# Altium PCB ArduinoUnoShield.PcbDoc
Units mm, origin at the board's own origin, x right, y up, seen from the top; angles counter-clockwise.
Board outline 53.34 x 59.34 mm, 2 copper layers (Top Layer, Bottom Layer), stack 1.521 mm thick; 32 components, 24 nets, 123 pads, 7 vias.
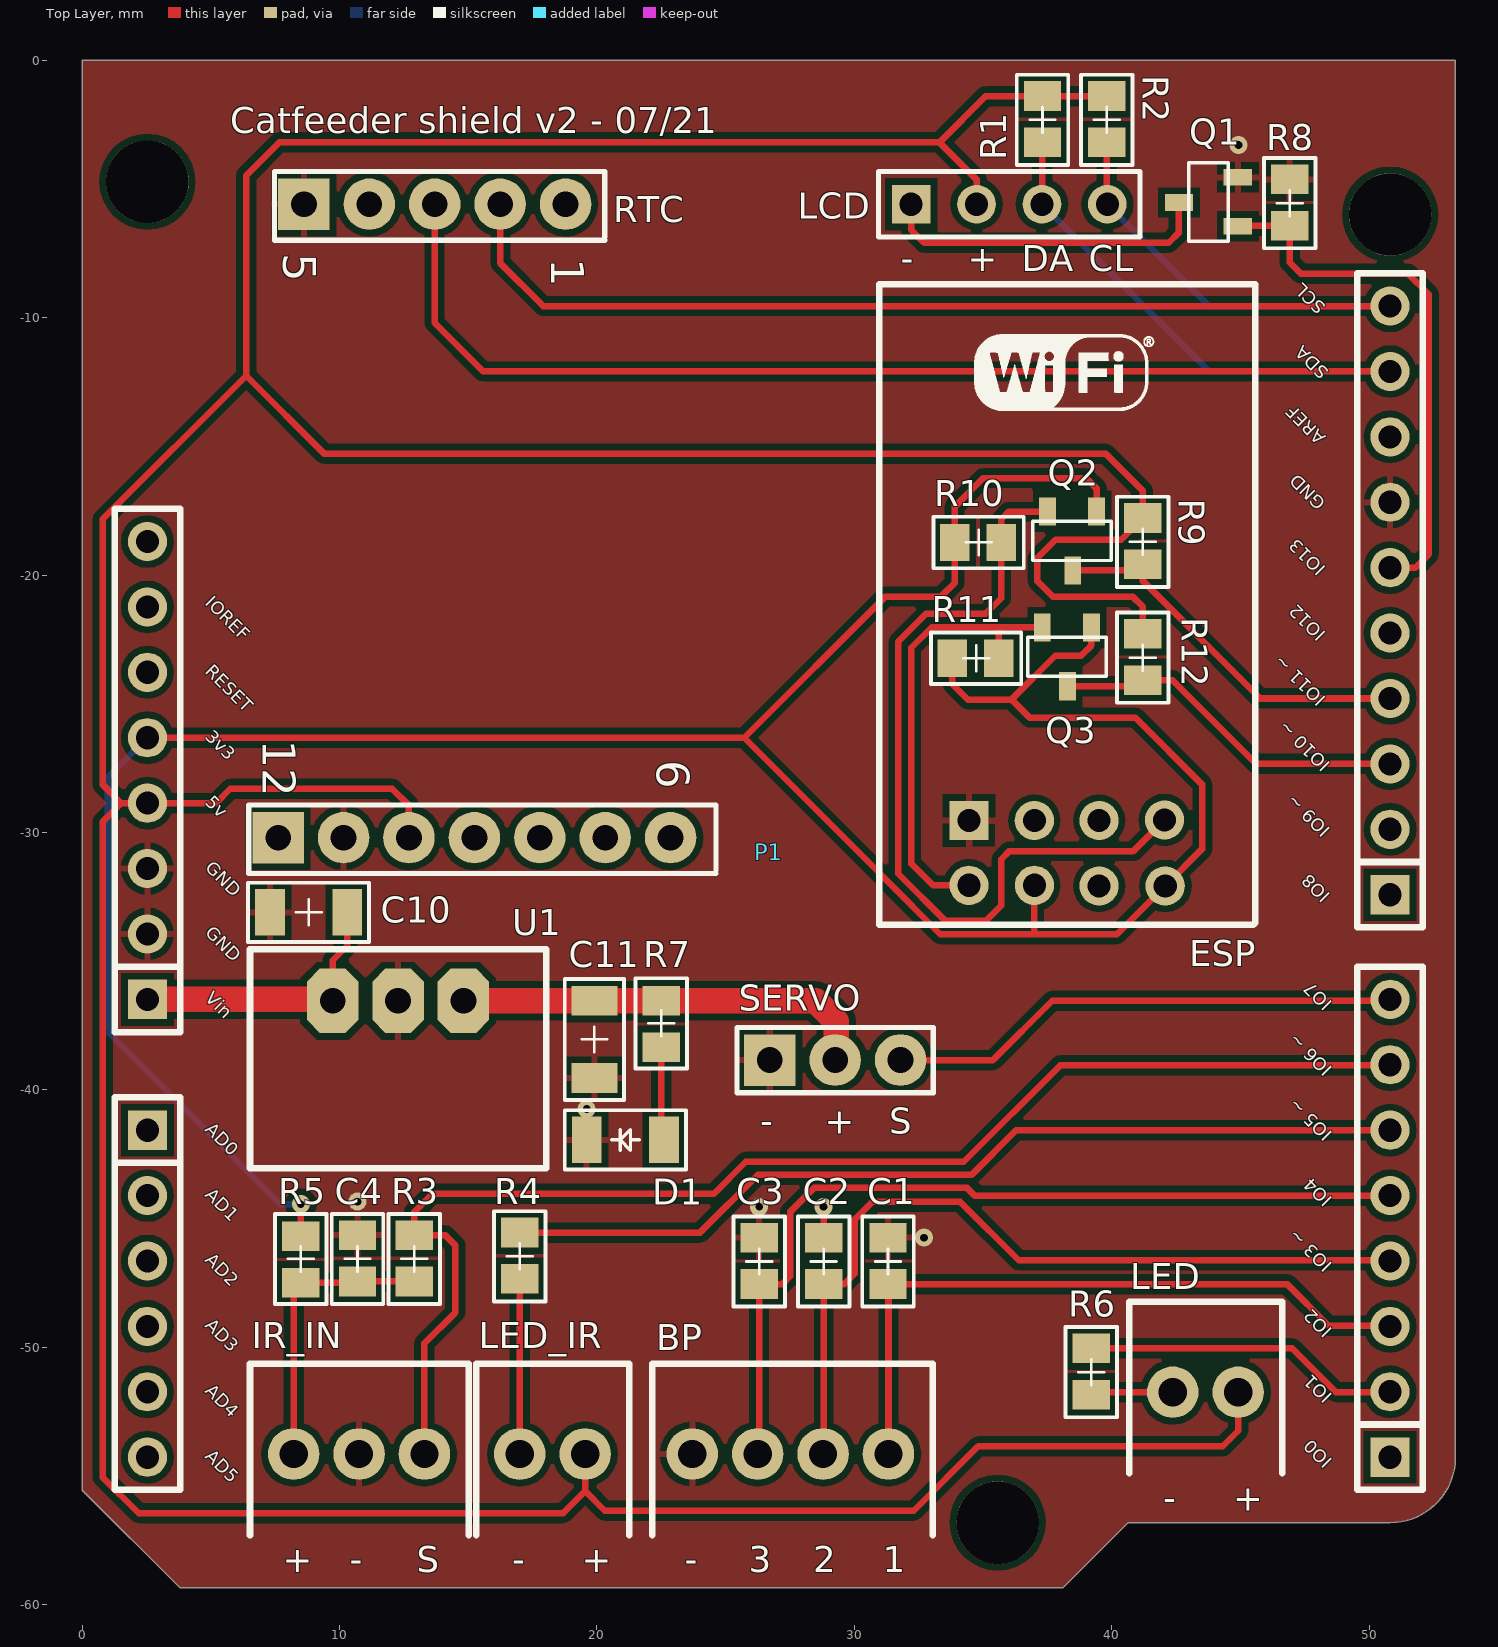
[diagram p0: Top Layer view]
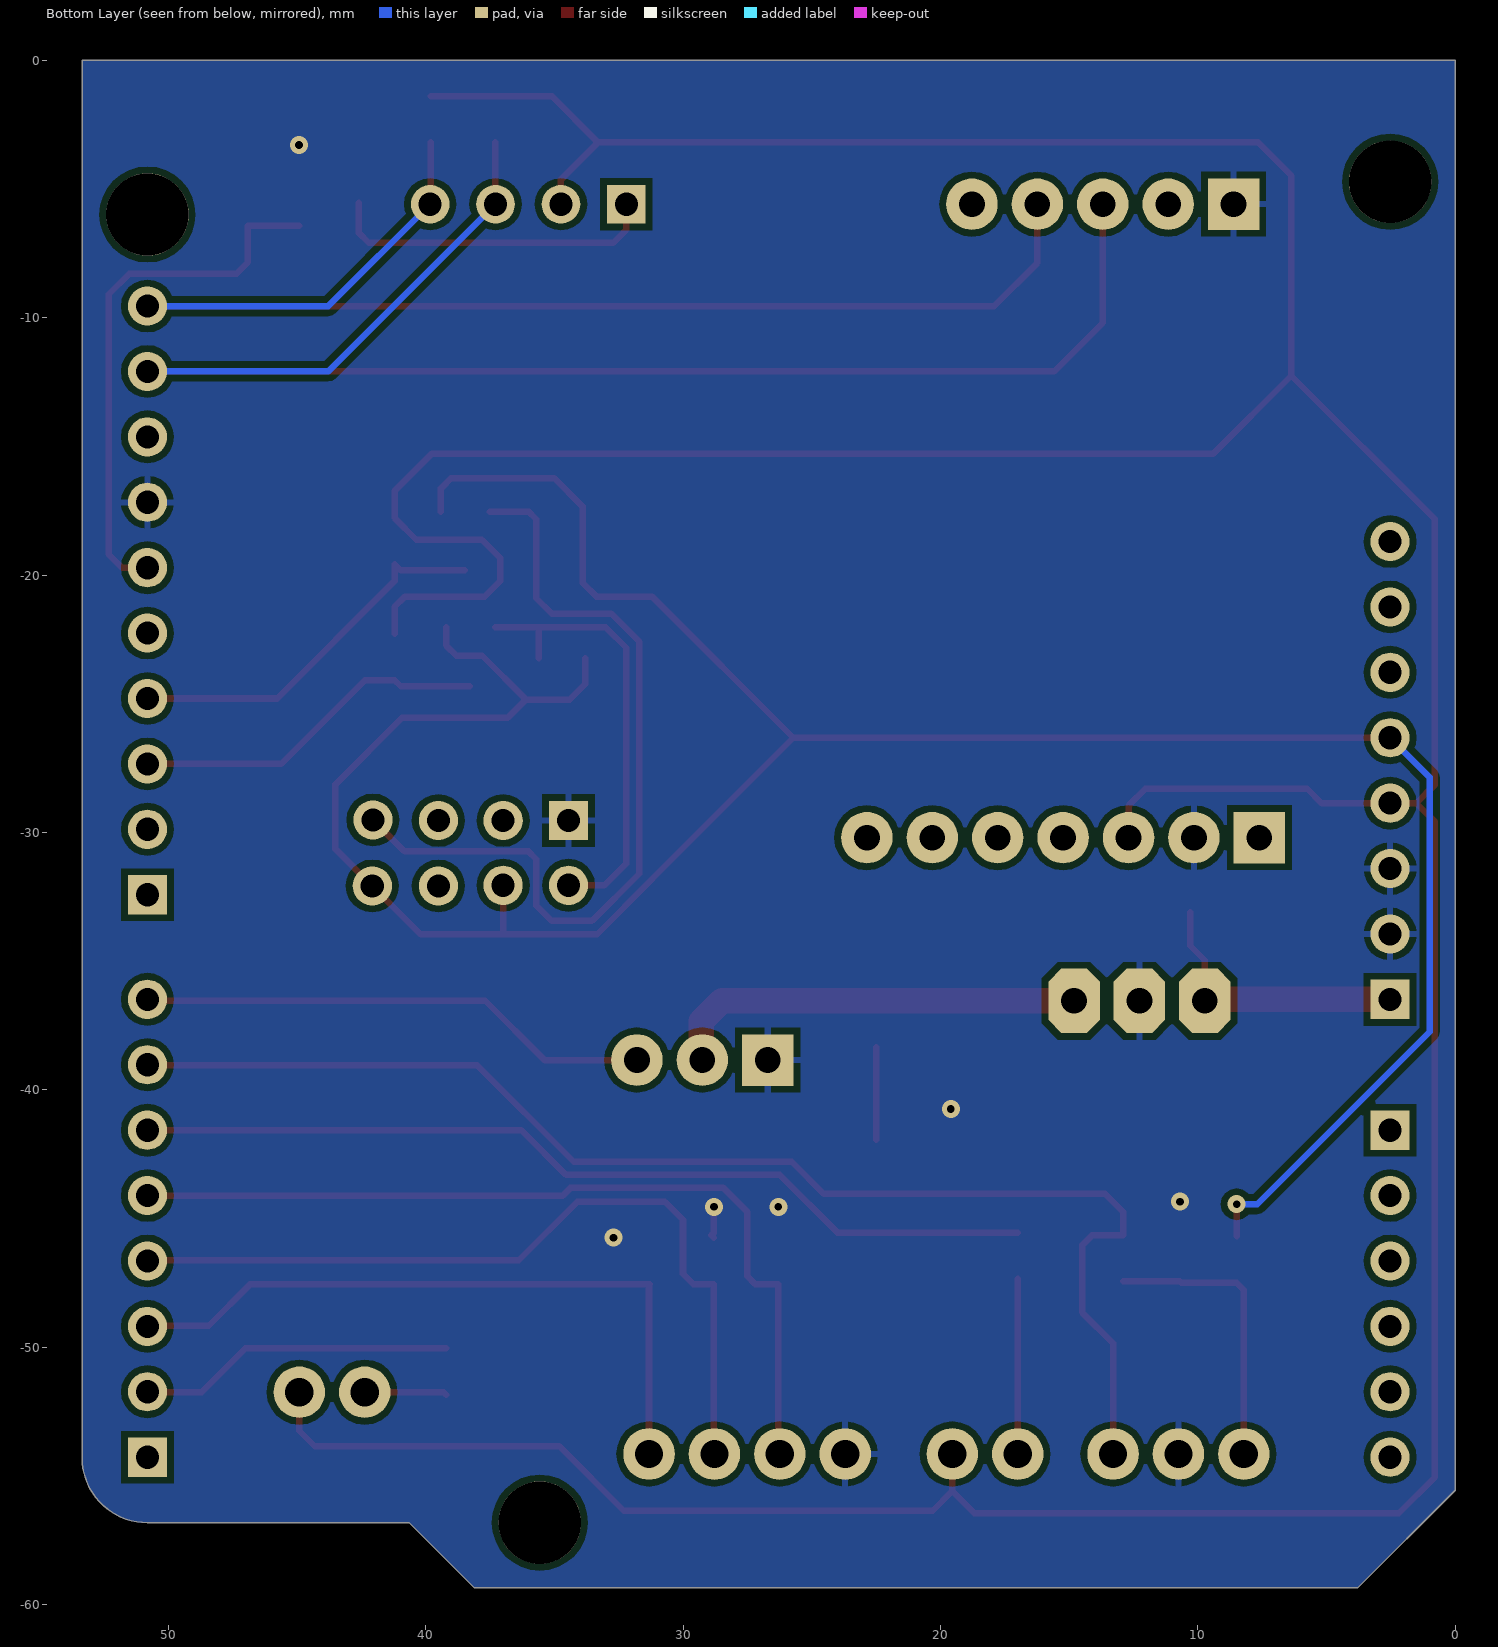
[diagram p1: Bottom Layer view, seen from below]

## Layer stack, top to bottom
Top Solder: solder mask 0.0102, Solder Resist, Dk 3.5
Top Layer: signal copper 0.0356
Dielectric1: dielectric 1.45, FR-4, Dk 4.8
Bottom Layer: signal copper 0.0356
Bottom Solder: solder mask 0.0102, Solder Resist, Dk 3.5

## Board outline
0.011,-55.541 3.81,-59.34 38.1,-59.34 40.64,-56.8 50.8,-56.8 ccw(c50.8,-54.26) 53.34,-54.26 53.34,0 0,0

## Design rules (kind name [scope] priority, off if disabled: settings)
Clearance [All] p1: gap=0.254 ignorepadtopadclearanceinfootprint=FALSE
HoleSize [All] p1: absolutevalues=TRUE maxlimit=5 minlimit=0.025 maxpercent=80.000 minpercent=20.000
PolygonConnect [All] p1: thpad.connectstyle=Relief thpad.reliefconductorwidth=0.254 thpad.reliefentries=4 thpad.polygonreliefangle="90 Angle" thpad.airgapwidth=0.254 smdpad.connectstyle=Relief smdpad.reliefconductorwidth=0.254 smdpad.reliefentries=4 smdpad.polygonreliefangle="90 Angle" smdpad.airgapwidth=0.254 via.connectstyle=Direct via.reliefconductorwidth=0.254 via.reliefentries=4 via.polygonreliefangle="90 Angle" via.airgapwidth=0.254
RoutingTopology [All] p1: topology=Vertical
RoutingVias [All] p1: holewidth=0.4 width=0.8 viastyle="Through Hole" minholewidth=0.4 minwidth=0.8 maxholewidth=0.4 maxwidth=0.8
SilkToSilkClearance [All] p1: silktosilkclearance=0.169
SilkToSolderMaskClearance SilkscreenOverComponentPads [IsPad] p1: minsilkscreentomaskgap=0.169 clearancetoexposedcopper=TRUE
SolderMaskExpansion [All] p1: expansion=0.102
Width [All] p1: maxlimit=1 minlimit=0.254 preferedwidth=0.254
26 further rules are at their usual default settings.

## Classes and differential pairs
component class IR: C4 IR_IN LED_IR R3 R4 R5
component class RTC: RTC
component class ArduinoUnoShield: P1 R1 R2
component class Wireless: ESP Q2 Q3 R9 R10 R11 R12
component class Display: BP C1 C2 C3 LCD LED Q1 R6 R8
component class Motor: C10 C11 D1 R7 SERVO U1

## Components (designator, comment, footprint, x,y, rotation, side; value= is the part's Value field where it differs from the comment)
BP "Bornier_4_vis" 282834-4 31.32,-54.136 r270 top
C1 "100nF" 0805-C 31.3,-45.736 r270 top
C2 "100nF" 0805-C 28.8,-45.736 r270 top
C3 "100nF" 0805-C 26.3,-45.736 r270 top
C4 "220n" 0805-C 10.7,-45.636 r270 top
C10 "10uF" 1206-C 7.3,-33.1 r0 top
C11 "10uF" 1206-C 19.9,-39.536 r90 top
D1 "Rouge 1206" 1206-Led-R 19.6,-41.936 r0 top
ESP "ESP8266 ESP-01" "ESP8266 ESP-01" 30.966,-33.6 r0 top locked
IR_IN "Bornier_3_vis" 282834-3 13.3,-54.136 r270 top
LCD "Header 4" HDR1X4 32.2,-5.6 r0 top
LED "Bornier_2_vis" 282834-2 44.9,-51.736 r270 top
LED_IR "Bornier_2_vis" 282834-2 19.54,-54.136 r270 top
P1 "UNO4NUCLEO" UNO4NUCLEO 50.8,-6 r270 top locked
Q1 "BSS123" SOT23-3 44.886,-6.461 r90 top
Q2 "BSS123" SOT23-3 39.4,-17.536 r180 top
Q3 "BSS123" SOT23-3 39.2,-22.038 r180 top
R1 "10k" 0805-R 37.3,-1.4 r270 top
R2 "10k" 0805-R 39.8,-1.4 r270 top
R3 "1k" 0805-R 12.9,-45.636 r270 top
R4 "330r" 0805-R 17,-45.536 r270 top
R5 "100r" 0805-R 8.5,-47.486 r90 top
R6 "330r" 0805-R 39.2,-50.036 r270 top
R7 "330r" 0805-R 22.5,-38.336 r90 top
R8 "10k" 0805-R 46.9,-4.636 r270 top
R9 "10k" 0805-R 41.2,-17.784 r270 top
R10 "10k" 0805-R 33.9,-18.736 r0 top
R11 "10k" 0805-R 33.8,-23.236 r0 top
R12 "10k" 0805-R 41.2,-22.286 r270 top
RTC "TinyRTC" "Tiny RTC" 7.618,-30.2 r270 top
SERVO "Header 3" HDR1X3 26.709,-38.837 r0 top
U1 "R-78B5.0-2.0" R78HB50V 9.734,-36.536 r180 top

## Footprints (in the part's own frame and the unit in brackets; to place one, negate y for a bottom-side part, rotate by r counter-clockwise, add the part's x,y. Pads: shape width x height; smd on the part's side, far side on the other; paste and mask are expansions set on the pad)
0805-C [mm] "Empreinte CMS CDR31 dim = 2.0 x 1.2"
  rect 1.15x1.45 smd: 1(0,0) 2(1.8,0)
  silkscreen extent -0.82,-1 2.68,1, body extent -0.34,-0.62 2.17,0.62, height 0.79
0805-R [mm] "Empreinte CMS CDR31 dim = 2.0 x 1.2"
  rect 1.15x1.45 smd: 1(0,0) 2(1.8,0)
  silkscreen extent -0.83,-1 2.67,1, body extent -0.09,-0.62 1.91,0.63, height 0.45
1206-C [mm] "Empreinte CMS CDR32  dim = 3.2 x 1.6"
  rect 1.15x1.8 smd: 1(0,0) 2(3,0)
  silkscreen extent -0.85,-1.15 3.85,1.15, body extent -0.13,-0.75 3.07,0.85, height 1
1206-Led-R [mm] "Diode CMS CDR33 3.2 x 1.6"
  rect 1.15x1.8 smd: 1(0,0) 2(3,0)
  silkscreen extent -0.85,-1.15 3.85,1.15, body extent -0.08,-0.8 3.12,0.8, height 0.6
282834-2 [mm] "Bornier 2vis"
  round 2 hole 1.1: 1(0,0) 2(0,-2.54)
  silkscreen extent -3.51,-4.24 3.16,1.71, body extent -3.28,-4.05 3.22,1.49, height 10
282834-3 [mm] "Bornier 3vis"
  round 2 hole 1.1: 1(0,0) 2(0,-2.54) 3(0,-5.08)
  silkscreen extent -3.51,-6.78 3.16,1.71, body extent -3.28,-6.55 3.22,1.53, height 10
282834-4 [mm] "Bornier 4vis"
  round 2 hole 1.1: 1(0,0) 2(0,-2.54) 3(0,-5.08) 4(0,-7.62)
  silkscreen extent -3.51,-9.18 3.16,1.71, body extent -3.34,-9.11 3.16,1.51, height 10
"ESP8266 ESP-01" [mil] "ESP8266 ESP-01"
  rect 60x60 hole 35.43: 1(137,160)
  round 60 hole 35.43: 2(137,61) 3(237,160) 4(237.01,60.98) 5(336,160) 6(336,60) 7(436,161) 8(437,60)
  silkscreen extent 0,1 575,980, body extent 2,0 573,976
HDR1X3 [mm] "Connector; Header; 3 Position"
  rect 2x2 hole 1: 1(0,0)
  round 2 hole 1: 2(2.54,0) 3(5.08,0)
  silkscreen extent -1.27,-1.27 6.35,1.27
HDR1X4 [mm] "Connector; Header; 4 Position"
  rect 1.5x1.5 hole 0.9: 1(0,0)
  round 1.5 hole 0.9: 2(2.54,0) 3(5.08,0) 4(7.62,0)
  silkscreen extent -1.27,-1.27 8.89,1.27
R78HB50V [mm]
  oct 2x2.5 hole 1: 1(0,0) 2(-2.54,0) 3(-5.08,0)
  silkscreen extent -8.29,-2 3.21,6.5, body extent -8.29,-2 3.21,6.5, height 3.12
SOT23-3 [mm] "JEDEC TO-263AB"
  rect 0.65x1.1 smd: 1(0,0) 2(1.905,0) 3(0.925,2.286)
  silkscreen extent -0.58,0.37 2.48,1.9, body extent -0.58,-0.1 2.42,2.4, height 1.08
"Tiny RTC" [mm] "Connector; Header; 5+7 Position"
  round 2 hole 1: 1(-24.6,11.16) 2(-24.6,8.62) 3(-24.6,6.08) 4(-24.6,3.54) 6(0,15.24) 7(0,12.7) 8(0,10.16) 9(0,7.62) 10(0,5.08) 11(0,2.54)
  rect 2x2 hole 1: 5(-24.6,1) 12(0,0)
  silkscreen extent -25.87,-1.14 1.4,17
UNO4NUCLEO [mil]
  round 125.98 hole 125.98: 0(-50,-1900) 0(0,0) 0(2000,-600)
  round 60 hole 35.43: 1(500,-1900) 2(600,-1900) 3(700,-1900) 4(800,-1900) 5(900,-1900) 6(1000,-1900) 7(1100,-1900) 10(1500,-1900) 11(1600,-1900) 12(1700,-1900) 13(1800,-1900) 14(1900,-1900) 22(1800,0) 23(1700,0) 24(1600,0) 25(1500,0) 26(1400,0) 27(1300,0) 28(1200,0) 30(940,0) 31(840,0) 32(740,0) 33(640,0) 34(540,0) 35(440,0) 36(340,0) 37(240,0) 38(140,0)
  rect 60x60 hole 35.43: 8(1200,-1900) 9(1400,-1900) 21(1900,0) 29(1040,0)
  silkscreen extent 90,-1950 1950,50, body extent 90,-1950 1950,50, height 335

## Part data
BP: "Bornier fil-à-carte, 2.54 mm, 4 Voies, 30 AWG, 16 AWG, 1.4 mm², Par vis", Voltage=150V, Fabricant=TE, Fournisseur=Farnell, RefFabricant=282834-4, RefFournisseur=2396253, Valeur="10A - 4voies"
C1 C2 C3: library part Cap_np, "Condensateur céramique multicouche CMS, 0.1 µF, 50 V, 0805 [2012 Metric], ± 10%, X7R", Voltage=50V, Fabricant=AVX, Fournisseur=Farnell, RefFabricant=08055C104KAT2A, RefFournisseur=499687, Revision="July-2002: Re-released for DXP Platform.", Valeur=100nF
C4: library part Cap_np, "Condensateur céramique multicouche CMS, 0.22 µF, 50 V, 0805 [2012 Metric], ± 10%, X7R", Voltage=50V, Fabricant=WALSIN, Fournisseur=Farnell, RefFabricant=0805B224K500CT, RefFournisseur=2496964, Valeur=220n
C10 C11: library part Cap_np, "Condensateur céramique multicouche CMS, 10 µF, 25 V, 1206 [3216 Metric], ± 10%, X5R, Série MC", Voltage=25V, Fabricant="MULTICOMP PRO", Fournisseur=Farnell, RefFabricant=MC1206X106K250CT, RefFournisseur=2320887, Valeur=10uF
D1: library part "LED CMS 1206 Red", "LED, Basse puissance, Rouge, CMS, 1206 (Métrique 3216), 20 mA, 1.85 V, 640 nm", Voltage=1.85V, Fabricant=KINGBRIGHT, Fournisseur=Farnell, RefFabricant=KPTD-3216SRC-PRV, RefFournisseur=2001662, Revision="July-2002: Re-released for DXP Platform.", Valeur="Rouge 1206"
ESP: "Embase PCB, Carte-à-carte, 2.54 mm, 2 Rangée(s), 8 Contact(s), Montage traversant, Série 2214S", Fabricant="MULTICOMP PRO", Fournisseur=Farnell, RefFabricant=2214S-08SG-85, RefFournisseur=1593489, Valeur="2*4 cts"
IR_IN: "Bornier fil-à-carte, 2.54 mm, 3 Voies, 30 AWG, 16 AWG, 1.4 mm², Par vis", Voltage=150V, Fabricant=TE, Fournisseur=Farnell, RefFabricant=282834-3, RefFournisseur=2396254, Valeur="10A - 3voies"
LCD P1 SERVO: "Header mâle, Carte-à-carte, 2.54 mm, 1 Rangée(s), 10 Contact(s), Traversant, droit, Série 2211S", Fabricant="MULTICOMP PRO", Fournisseur=Farnell, RefFabricant=2211S-10G, RefFournisseur=1593417, Valeur="10 cts"
LED LED_IR: "Bornier fil-à-carte, 2.54 mm, 2 Voies, 30 AWG, 16 AWG, 1.4 mm², Par vis", Voltage=150V, Fabricant=TE, Fournisseur=Farnell, RefFabricant=282834-2, RefFournisseur=2112482, Valeur="10A - 2voies"
Q1 Q2 Q3: library part 2N7000, "MOSFET de puissance, Canal N, 100 V, 170 mA, 1.2 ohm, SOT-23, Montage en surface", Voltage=100V, Fabricant="ON SEMICONDUCTOR", Fournisseur=Farnell, RefFabricant=BSS123, RefFournisseur=9845321
R1 R2 R8 R9 R10 R11 R12: library part Res, "Résistance à puce CMS, 10 kohm, ± 1%, 250 mW, 0805 [2012 Metric], Couche épaisse, Haute puissance", Voltage=150V, Fabricant="MULTICOMP PRO", Fournisseur=Farnell, RefFabricant=MCWF08P1002FTL, RefFournisseur=2694096, Valeur=10k
  R1 R2 R9 R10 R11 R12: Revision="July-2002: Re-released for DXP Platform."
R3: library part Res, "Résistance à puce CMS, Couche épaisse, 1 kohm, ± 1%, 125 mW, 0805 [2012 Metric], Couche épaisse", Fabricant="MULTICOMP PRO", Fournisseur=Farnell, RefFabricant=MCWR08X1001FTL, RefFournisseur=2447587, Revision="July-2002: Re-released for DXP Platform.", Valeur=1k
R4 R6 R7: library part Res, "Résistance à puce CMS, Couche épaisse, 330 ohm, ± 1%, 125 mW, 0805 [2012 Metric], Couche épaisse", Voltage=150V, Fabricant="MULTICOMP PRO", Fournisseur=Farnell, RefFabricant=MCWR08X3300FTL, RefFournisseur=2447638, Valeur=330r
  R4 R6: Revision="July-2002: Re-released for DXP Platform."
R5: library part Res, "Résistance à puce CMS, 100 ohm, ± 1%, 500 mW, 0805 [2012 Metric], Couche épaisse, Anti-Surtension", Voltage=150V, Fabricant=Yageo, Fournisseur=Farnell, RefFabricant=SR0805FR-47100RL, RefFournisseur=3496794, Revision="July-2002: Re-released for DXP Platform.", Valeur=100r
RTC: "Embase PCB, Carte-à-carte, 2.54 mm, 1 Rangée(s), 5 Contact(s), Montage traversant, SSW Series", Fabricant=SAMTEC, Fournisseur=Farnell, RefFabricant=SSW-105-01-G-S, RefFournisseur=2578707, Valeur="5 cts"
U1: library part R78HB50, "Convertisseur DC/DC POL non isolé, 1 sortie, 10 W, 5 V, 2 A, Fixe, Traversant", Voltage="IN 6.5V-32V ; OUT 5V", Fabricant="RECOM POWER", Fournisseur=Farnell, RefFabricant=R-78B5.0-2.0, RefFournisseur=2747528

## Via types
v1: diameter 0.7, hole 0.3, Top Layer to Bottom Layer, tented both sides, 7 vias

## Nets (pads, with @x,y where several pads share a name; then routed paths per layer and width w, separated by ;. In a path a pad name is that pad's centre, name@x,y a point inside that pad or via, vN(x,y) a via of type N, cw(c..) or ccw(c..) an arc to the next point about the centre after c; other vN are vias at no path point)
3V3: ESP.4 ESP.8 P1.4 Q2.1 Q3.1 R5.2 R10.1 R11.1 | length 111.1
  Top Layer w0.254: P1.4 25.72,-26.32 ; R5.2 v1(8.5,-44.436) ; R11.1 33.8,-24.236 34.4,-24.836 36.1,-24.836 ; ESP.4 36.986,-33.95 ; Q3.1 39.2,-22.736 38.8,-23.136 37.8,-23.136 36.1,-24.836 ; Q2.1 39.4,-16.636 39,-16.236 35,-16.236 33.9,-17.336 R10.1 33.9,-20.3 33.36,-20.84 31.2,-20.84 25.72,-26.32 ; 25.72,-26.32 31.192,-31.792 31.192,-31.81 33.332,-33.95 36.986,-33.95 ; 36.1,-24.836 36.8,-25.536 40.9,-25.536 43.5,-28.136 43.5,-30.641 ESP.8 40.191,-33.95 36.986,-33.95
  Bottom Layer w0.254: P1.4 1,-27.86 1,-37.736 7.7,-44.436 v1(8.5,-44.436)
5V: LCD.2 LED.1 LED_IR.1 P1.5 R1.1 R2.1 R9.1 R12.1 RTC.10 | length 203
  Top Layer w0.254: RTC.10 12.698,-28.954 12.044,-28.3 5.761,-28.3 5.201,-28.86 P1.5 1.524,-28.86 ; LED_IR.1 19.54,-55.576 ; LCD.2@34.74,-6 LCD.2 34.74,-4.64 33.3,-3.2 ; R2.1 R1.1 35.1,-1.4 33.3,-3.2 ; R12.1 41.2,-21.236 40.8,-20.836 37.7,-20.836 37.1,-20.236 37.1,-19.336 37.808,-18.628 40.356,-18.628 R9.1 41.2,-16.736 39.764,-15.3 9.415,-15.3 6.375,-12.261 ; LED.1 44.9,-53.236 44.3,-53.836 34.8,-53.836 32.3,-56.336 20.3,-56.336 19.54,-55.576 ; 1.524,-28.86 0.8,-29.584 0.8,-55.036 2.2,-56.436 18.68,-56.436 19.54,-55.576 ; 1.524,-28.86 0.8,-28.136 0.8,-17.836 6.375,-12.261 ; 6.375,-12.261 6.375,-4.488 7.663,-3.2 33.3,-3.2
BP1: BP.1 C1.2 P1.23 | length 26.8
  Top Layer w0.254: BP.1 31.32,-47.556 C1.2 46.8,-47.536 48.42,-49.156 P1.23@50.8,-49.156
BP2: BP.2 C2.2 P1.24 | length 32.1
  Top Layer w0.254: BP.2 28.8,-54.116 C2.2 29.6,-47.536 30,-47.136 30,-45.036 30.7,-44.336 34.1,-44.336 36.38,-46.616 P1.24@50.8,-46.616
BP3: BP.3 C3.2 P1.25 | length 34.3
  Top Layer w0.254: BP.3 26.3,-54.076 C3.2 27.2,-47.536 27.5,-47.236 27.5,-44.736 28.431,-43.805 34.369,-43.805 34.664,-44.1 P1.25@50.776,-44.1 ; P1.25 P1.25@50.776,-44.1 ; P1.25@50.8,-44.076 P1.25@50.776,-44.1
GND: BP.4 C1.1 C2.1 C3.1 C4.1 C10.1 C11.1 D1.1 ESP.1 IR_IN.2 P1.6 P1.7 P1.35 Q1.2 R8.1 RTC.5 RTC.11 SERVO.1 U1.2 | length 1.3
  Top Layer w0.254: C2.1 28.9,-45.636 28.8,-45.536 v1(28.8,-44.536)
  other v1: 32.7,-45.736 26.3,-44.536 10.7,-44.336 19.6,-40.736 44.911,-3.302
IR_IN: IR_IN.1 P1.27 R3.1 | length 51.5
  Top Layer w0.254: IR_IN.1 13.3,-49.836 14.5,-48.636 14.5,-46.036 14.1,-45.636 R3.1 12.9,-44.736 13.6,-44.036 24.532,-44.036 25.779,-42.789 34.247,-42.789 38,-39.036 50.784,-39.036 P1.27
IR_OUT: P1.26 R4.1 | length 35.4
  Top Layer w0.254: R4.1 24,-45.536 26.239,-43.297 34.539,-43.297 36.276,-41.56 P1.26
LCD: P1.34 Q1.1 R8.2 | length 21.1
  Top Layer w0.254: Q1.1@44.911,-6.436 R8.2 46.9,-7.86 47.34,-8.3 51.5,-8.3 52.3,-9.1 52.3,-19.2 51.784,-19.716 P1.34
LED: P1.22 R6.1 | length 12.3
  Top Layer w0.254: R6.1 47,-50.036 48.7,-51.736 50.784,-51.736 P1.22
NetC4_2: C4.2 IR_IN.3 R3.2 R5.1 | length 11.2
  Top Layer w0.254: IR_IN.3 8.22,-47.766 R5.1 10.65,-47.486 C4.2 R3.2
NetC11_2: C11.2 R7.2 SERVO.2 U1.3 | length 16
  Top Layer w1: U1.3 28.491,-36.536 29.291,-37.335 SERVO.2@29.291,-38.506
NetD1_2: D1.2 R7.1 | length 3.6
  Top Layer w0.254: D1.2@22.5,-41.936 R7.1
NetLCD_1: LCD.1 Q1.3 | length 12.9
  Top Layer w0.254: LCD.1 32.2,-6.597 32.703,-7.1 42.2,-7.1 42.6,-6.7 Q1.3
NetLED_2: LED.2 R6.2 | length 3.2
  Top Layer w0.254: R6.2 39.3,-51.736 LED.2
NetLED_IR_2: LED_IR.2 R4.2 | length 6.8
  Top Layer w0.254: LED_IR.2 R4.2
RX5: P1.32 Q2.3 R9.2 | length 15
  Top Layer w0.254: Q2.3 40.962,-19.822 R9.2 41.2,-20.236 45.76,-24.796 P1.32
RX33: ESP.7 Q2.2 R10.2 | length 32.5
  Top Layer w0.254: Q2.2 36,-17.536 35.7,-17.836 R10.2 35.7,-20.9 35.1,-21.5 32.785,-21.5 31.7,-22.585 31.7,-31.6 33.536,-33.436 35.1,-33.436 35.7,-32.836 35.7,-31.036 36,-30.736 40.815,-30.736 ESP.7
SCL: LCD.4 P1.38 R2.2 RTC.2 | length 52.6
  Top Layer w0.254: RTC.2 16.238,-7.881 17.913,-9.556 P1.38 ; R2.2 39.8,-5.58 LCD.4
  Bottom Layer w0.254: LCD.4 43.776,-9.556 P1.38
SDA: LCD.3 P1.37 R1.2 RTC.3 | length 61.1
  Top Layer w0.254: RTC.3 13.698,-10.209 15.585,-12.096 P1.37 ; LCD.3 37.3,-5.58 R1.2
  Bottom Layer w0.254: LCD.3 43.776,-12.096 P1.37
SERVO: P1.28 SERVO.3 | length 20
  Top Layer w0.254: SERVO.3 35.377,-38.837 37.678,-36.536 50.744,-36.536 P1.28
TX5: P1.31 Q3.3 R12.2 | length 14
  Top Layer w0.254: Q3.3 40.962,-24.324 R12.2 42.35,-24.086 45.6,-27.336 P1.31
TX33: ESP.2 Q3.2 R11.2 | length 17.6
  Top Layer w0.254: ESP.2 33.051,-32.051 32.208,-31.208 32.208,-22.828 33,-22.036 35.6,-22.036 R11.2 ; 35.6,-22.038 Q3.2
VIN: C10.2 P1.8 U1.1 | length 10.8
  Top Layer w0.254: U1.1@9.734,-36.48 9.734,-34.966 10.3,-34.4 C10.2
  Top Layer w1: P1.8 U1.1@9.734,-36.48
pads on no net: ESP.3 ESP.5 ESP.6 P1.0 P1.1 P1.2 P1.3 P1.9 P1.10 P1.11 P1.12 P1.13 P1.14 P1.21 P1.29 P1.30 P1.33 P1.36 RTC.1 RTC.4 RTC.6 RTC.7 RTC.8 RTC.9 RTC.12

## Polygon pours and split planes (outlines as drawn)
GND on Bottom Layer "GND_L02_P004" (solid, pour order 4): 0.011,-55.541 3.81,-59.34 38.1,-59.34 40.64,-56.8 50.8,-56.8 ccw(c50.8,-54.26) 53.34,-54.26 53.34,0 0,0
GND on Top Layer "GND_L01_P006" (solid, pour order 6): 0.011,-55.541 3.81,-59.34 38.1,-59.34 40.64,-56.8 50.8,-56.8 ccw(c50.8,-54.26) 53.34,-54.26 53.34,0 0,0

## Silkscreen, mask and mechanical layers (free items; w line width, h text height)
Top Overlay:
  text "Catfeeder shield v2 - 07/21" at 5.766,-2.845 h1
  text "-" at 31.8,-8.2 h1
  text "+" at 34.4,-8.2 h1
  text "DA" at 36.5,-8.2 h1
  text "CL" at 39.1,-8.2 h1
  text "-" at 26.346,-41.693 h1
  text "+" at 28.846,-41.693 h1
  text "S" at 31.346,-41.693 h1
  text "-" at 42,-56.336 h1
  text "+" at 44.7,-56.336 h1
  text "+" at 7.8,-58.736 h1
  text "-" at 10.4,-58.736 h1
  text "S" at 13,-58.736 h1
  text "-" at 16.7,-58.736 h1
  text "+" at 19.4,-58.736 h1
  text "-" at 23.4,-58.736 h1
  text "3" at 25.9,-58.736 h1
  text "2" at 28.4,-58.736 h1
  text "1" at 31.1,-58.736 h1

## Text inside footprints (layer, text, board x,y; h text height)
ESP: Mechanical 13 "ANTENNA AREA" at 31.221,-9.252 h0.25; Mechanical 13 "CUTOUT POLYGON" at 31.221,-9.76 h0.25
P1: Top Overlay "SCL" at 48.334,-9.556 h0.51 r135; Top Overlay "SDA" at 48.461,-12.096 h0.51 r135; Top Overlay "IOREF" at 4.752,-21.113 h0.51 r315; Top Overlay "RESET" at 4.752,-23.78 h0.51 r315; Top Overlay "3v3" at 4.752,-26.32 h0.51 r315; Top Overlay "5v" at 4.752,-28.86 h0.51 r315; Top Overlay "GND" at 4.752,-31.4 h0.51 r315; Top Overlay "GND" at 4.752,-33.94 h0.51 r315; Top Overlay "Vin" at 4.752,-36.48 h0.51 r315; Top Overlay "AD0" at 4.752,-41.56 h0.51 r315; Top Overlay "AD1" at 4.752,-44.1 h0.51 r315; Top Overlay "AD2" at 4.752,-46.64 h0.51 r315; Top Overlay "AD3" at 4.752,-49.18 h0.51 r315; Top Overlay "AD4" at 4.752,-51.72 h0.51 r315; Top Overlay "AD5" at 4.752,-54.26 h0.51 r315; Top Overlay "IO0" at 48.588,-54.387 h0.51 r135; Top Overlay "IO1" at 48.588,-51.847 h0.51 r135; Top Overlay "IO2" at 48.588,-49.307 h0.51 r135; Top Overlay "IO3 ~" at 48.588,-46.767 h0.51 r135; Top Overlay "IO4" at 48.588,-44.227 h0.51 r135; Top Overlay "IO5 ~" at 48.588,-41.687 h0.51 r135; Top Overlay "IO6 ~" at 48.588,-39.147 h0.51 r135; Top Overlay "IO7" at 48.588,-36.607 h0.51 r135; Top Overlay "IO8" at 48.514,-32.416 h0.51 r135; Top Overlay "IO9 ~" at 48.514,-29.876 h0.51 r135; Top Overlay "IO10 ~" at 48.514,-27.336 h0.51 r135; Top Overlay "IO11 ~" at 48.334,-24.796 h0.51 r135; Top Overlay "IO12" at 48.334,-22.256 h0.51 r135; Top Overlay "IO13" at 48.334,-19.716 h0.51 r135; Top Overlay "GND" at 48.334,-17.176 h0.51 r135; Top Overlay "AREF" at 48.334,-14.636 h0.51 r135
RTC: Top Overlay "1" at 18.218,-7.7 h1.27 r270; Top Overlay "5" at 7.818,-7.5 h1.27 r270; Top Overlay "6" at 22.318,-27.2 h1.27 r270; Top Overlay "12" at 7.018,-26.4 h1.27 r270